# EAGLE board koznole - kopie (EAGLE 9.6.2)
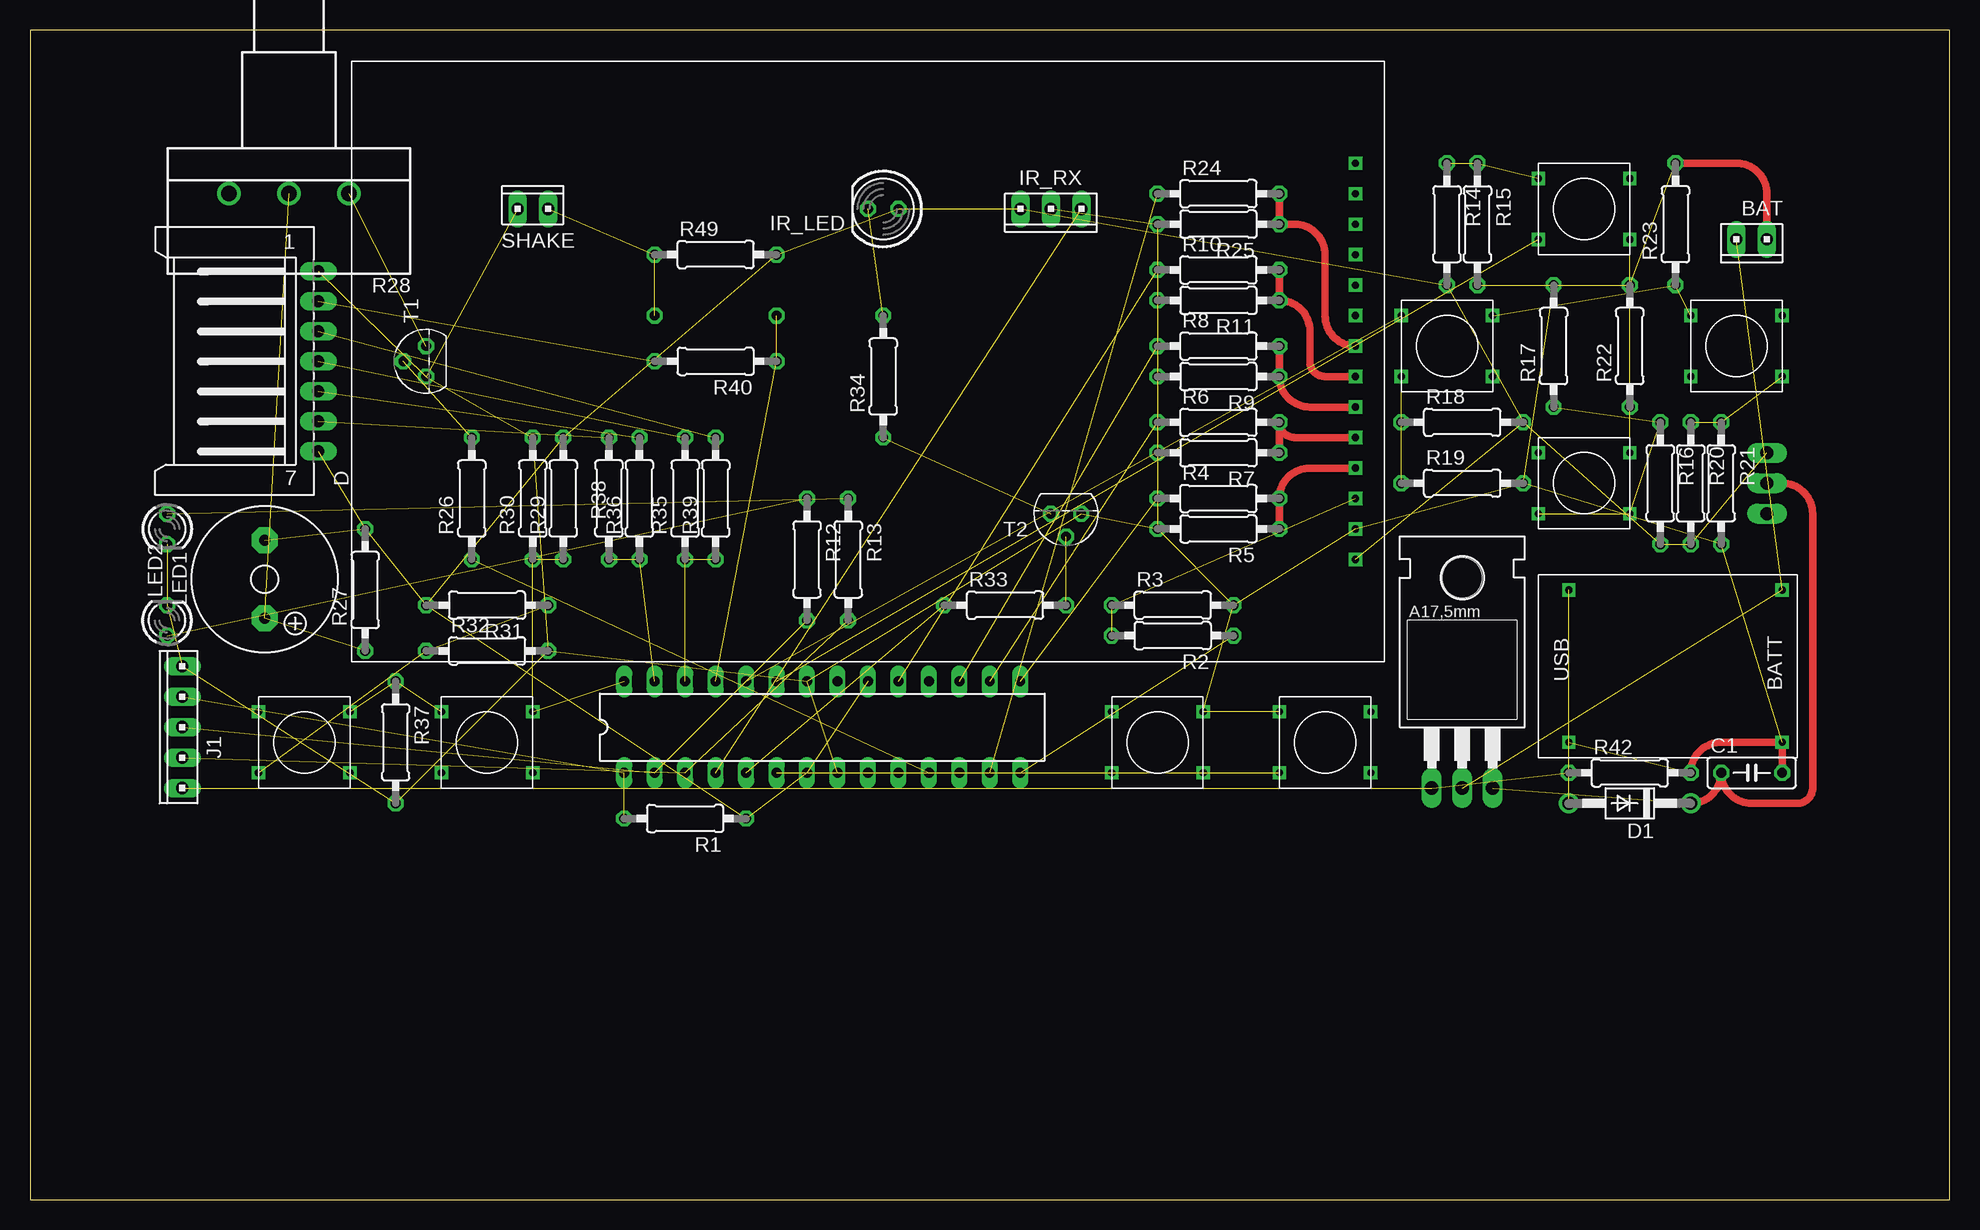
[diagram p0: board, top side]
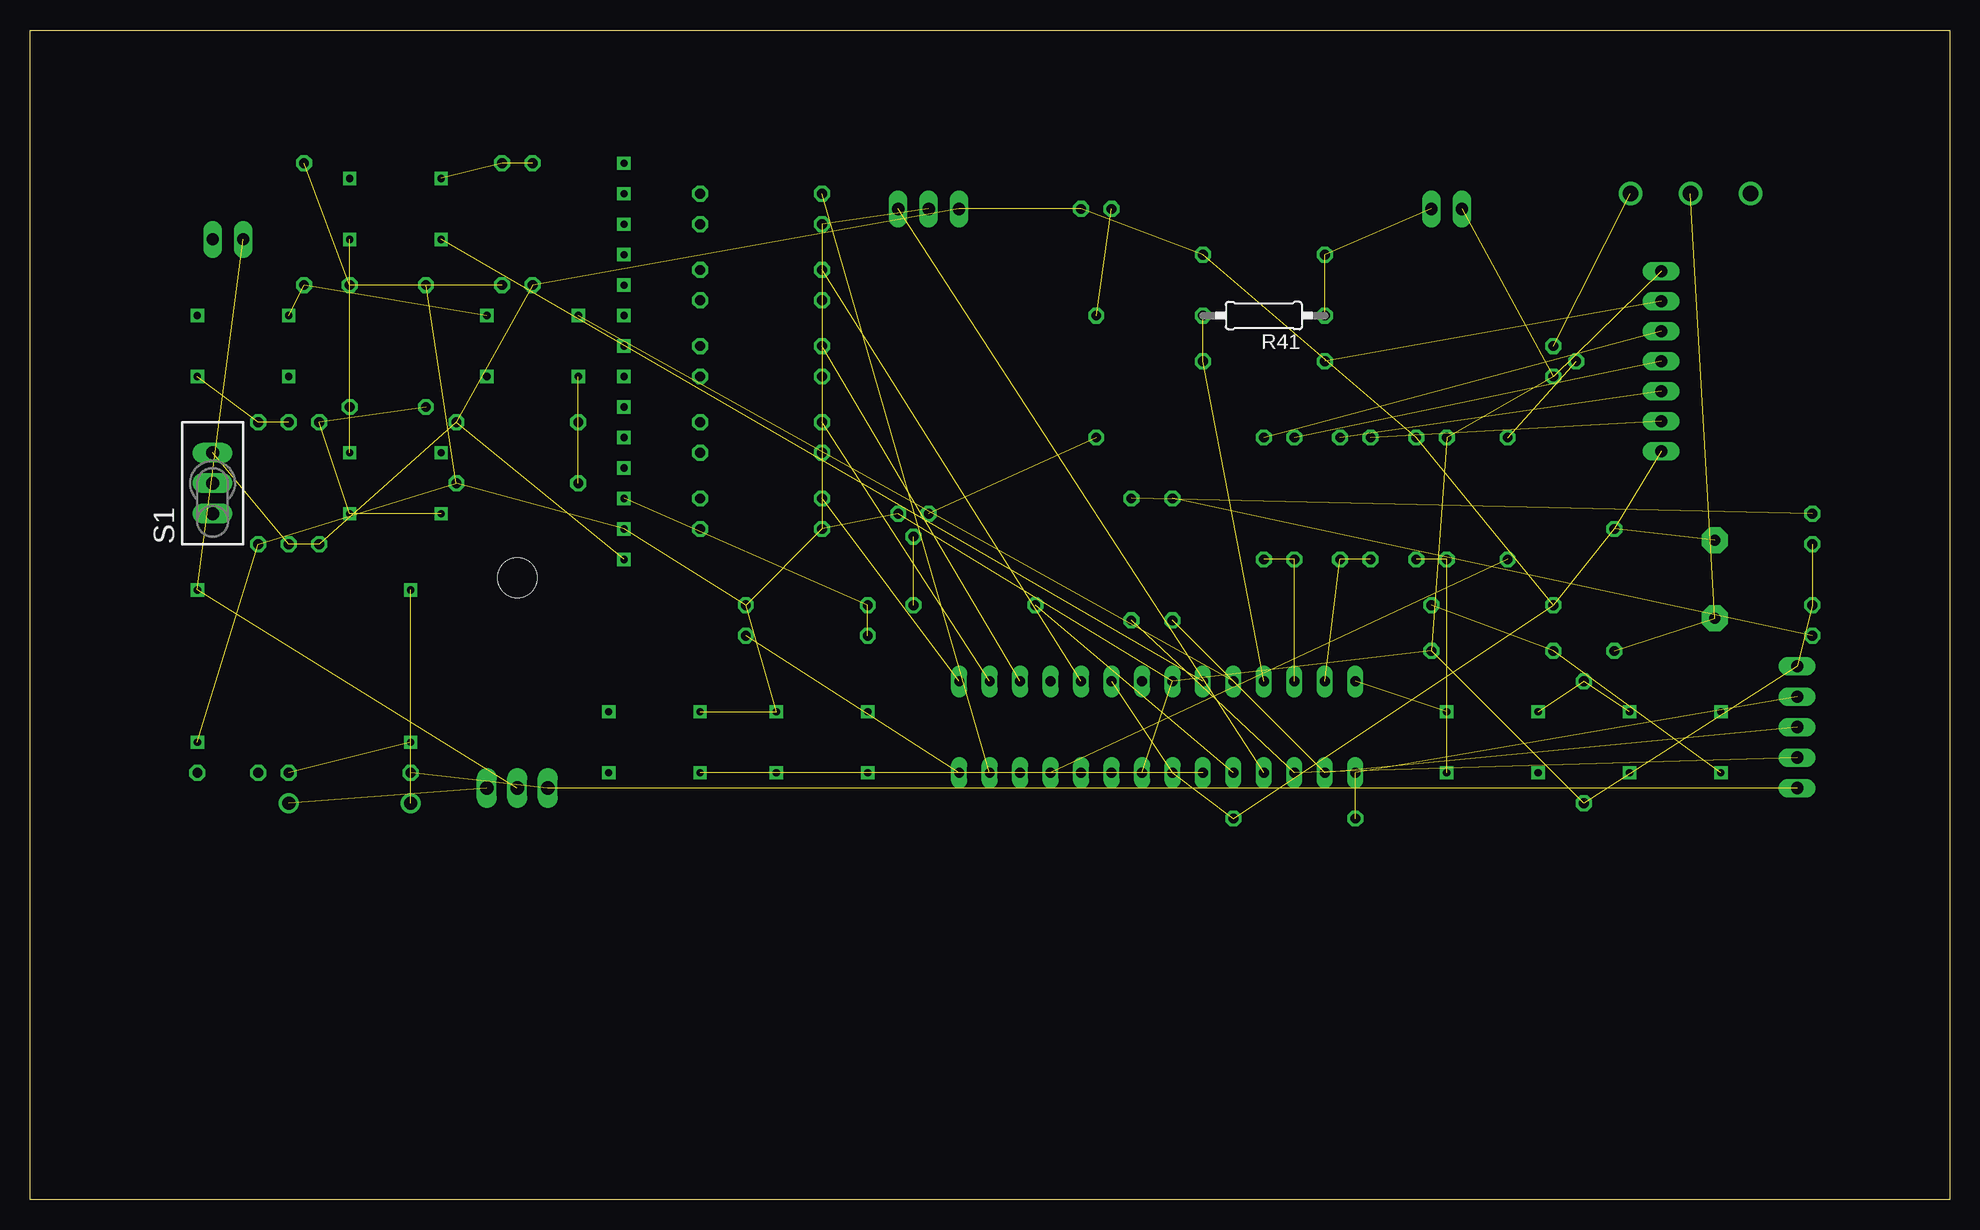
[diagram p1: board, bottom side, seen from below]

Size 160 x 97.46 mm. Coordinates in mm from the lower left corner, seen from the top.
Outline: 0,0 160,0 160,97.46 0,97.46 0,0
Copper layers (1*16): Top 0.035mm / dielectric 1.5mm / Bottom 0.035mm
Design rules "default *": minimum track width 24mil, minimum drill 0.6mm, track to track 24mil, track to pad 24mil, pad to pad 24mil, via to via 24mil, smd to smd 6mil, copper to edge 40mil, drill to drill 6mil, minimum pad ring 10mil, minimum via ring 8mil, stop-mask expansion 4mil, vias tented up to drill 0mil, thermal gap 10mil

## Footprints (pad centres in the part's own frame; a part is rotated, then mirrored left to right if it is on the bottom)
10X02MTA = drill 1.016 long: 1 1.27,0; 2 -1.27,0
C050-025X075 = drill 0.813 octagon: 1 -2.54,0; 2 2.54,0
L07P = drill 1.016 long: 1 7.5,-6.25; 2 5,-6.25; 3 2.5,-6.25; 4 0,-6.25; 5 -2.5,-6.25; 6 -5,-6.25; 7 -7.5,-6.25
DO41-10 = drill 1.118: A 5.08,0; C -5.08,0
DIL28-3 = drill 0.813 long: 1 -16.51,-3.81; 2 -13.97,-3.81; 3 -11.43,-3.81; 4 -8.89,-3.81; 5 -6.35,-3.81; 6 -3.81,-3.81; 7 -1.27,-3.81; 8 1.27,-3.81; 9 3.81,-3.81; 10 6.35,-3.81; 11 8.89,-3.81; 12 11.43,-3.81; 13 13.97,-3.81; 14 16.51,-3.81; 15 16.51,3.81; 16 13.97,3.81; 17 11.43,3.81; 18 8.89,3.81; 19 6.35,3.81; 20 3.81,3.81; 21 1.27,3.81; 22 -1.27,3.81; 23 -3.81,3.81; 24 -6.35,3.81; 25 -8.89,3.81; 26 -11.43,3.81; 27 -13.97,3.81; 28 -16.51,3.81
LED5MM = drill 0.813 octagon: A -1.27,0; K 1.27,0
10X03MTA = drill 1.016 long: 1 2.54,0; 2 0,0; 3 -2.54,0
10X05MTA = drill 1.016 long: 1 5.08,0; 2 2.54,0; 3 0,0; 4 -2.54,0; 5 -5.08,0
LED3MM = drill 0.813 octagon: A -1.27,0; K 1.27,0
TO220BH = drill 1.118 long: D 0,-6.35; G -2.54,-6.35; S 2.54,-6.35 | hole 3.302: 0,11.176
0207/10 = drill 0.813 octagon: 1 -5.08,0; 2 5.08,0
CIP20C-6MM = drill 1.3 pad 1.93: A -5,0; E 5,0; S 0,0
TL3XPO = drill 1.1 pad 1.422 long: 1 -2.54,0; 2 0,0; 3 2.54,0
F/QMX = drill 0.914 pad 2.159 octagon: + 3.251,0; - -3.251,0
TO92 = drill 0.813 octagon: 1 1.27,0; 2 0,1.905; 3 -1.27,0
TACT = drill 0.6 square: P$1 -3.81,2.54; P$2 -3.81,-2.54; P$3 3.81,-2.54; P$4 3.81,2.54
DISPLAY = drill 0.6 square: CS -40.64,11.43; D/C -40.64,6.35; GND -40.64,13.97; LED -40.64,-1.27; RESET -40.64,8.89; SCK -40.64,1.27; SDI -40.64,3.81; SDO -40.64,-3.81; T_CLK -40.64,-6.35; T_CS -40.64,-8.89; T_DIN -40.64,-11.43; T_IRQ -40.64,-16.51; T_OUT -40.64,-13.97; VCC -40.64,16.51
LI_ION_CHARGER = drill 0.6 square: BAT+ 8.89,6.35; BAT- 8.89,-6.35; GND -8.89,-6.35; VIN -8.89,6.35

## Placement (x,y rotation side)
BAT  [10X02MTA]  143.51,80.01 180 top
C1  1uF  [C050-025X075]  143.51,35.56 0 top
D  [L07P]  17.78,69.85 90 top
D1  1N4004  [DO41-10]  133.35,33.02 180 top
IC1  MEGA8-P  [DIL28-3]  66.04,39.37 0 top
IR_LED  [LED5MM]  71.12,82.55 180 top
IR_RX  [10X03MTA]  85.09,82.55 180 top
J1  [10X05MTA]  12.7,39.37 90 top
LED1  [LED3MM]  11.43,55.88 270 top
LED2  [LED3MM]  11.43,48.26 90 top
Q1  IRF4905  [TO220BH]  119.38,40.64 0 top
R1  10k  [0207/10]  54.61,31.75 180 top
R2  1k  [0207/10]  95.25,46.99 180 top
R3  2k  [0207/10]  95.25,49.53 0 top
R4  1k  [0207/10]  99.06,58.42 0 top
R5  2k  [0207/10]  99.06,55.88 180 top
R6  1k  [0207/10]  99.06,64.77 0 top
R7  2k  [0207/10]  99.06,62.23 180 top
R8  1k  [0207/10]  99.06,71.12 0 top
R9  2k  [0207/10]  99.06,68.58 180 top
R10  1k  [0207/10]  99.06,77.47 0 top
R11  2k  [0207/10]  99.06,74.93 180 top
R12  10k  [0207/10]  64.77,53.34 270 top
R13  10k  [0207/10]  68.2,53.34 270 top
R14  10k  [0207/10]  118.11,81.28 270 top
R15  1k  [0207/10]  120.65,81.28 270 top
R16  10k  [0207/10]  135.89,59.69 270 top
R17  3k  [0207/10]  127,71.12 90 top
R18  10k  [0207/10]  119.38,64.77 0 top
R19  1k  [0207/10]  119.38,59.69 0 top
R20  10k  [0207/10]  138.43,59.69 270 top
R21  3k  [0207/10]  140.97,59.69 270 top
R22  10k  [0207/10]  133.35,71.12 90 top
R23  10k  [0207/10]  137.16,81.28 90 top
R24  1k  [0207/10]  99.06,83.82 0 top
R25  2k  [0207/10]  99.06,81.28 180 top
R26  1k  [0207/10]  36.83,58.42 90 top
R27  1k  [0207/10]  27.94,50.8 90 top
R28  [CIP20C-6MM]  21.59,83.82 180 top
R29  10k  [0207/10]  44.45,58.42 90 top
R30  1k  [0207/10]  41.91,58.42 90 top
R31  10k  [0207/10]  38.1,49.53 180 top
R32  3k  [0207/10]  38.1,45.72 0 top
R33  1k  [0207/10]  81.28,49.53 0 top
R34  47Ohm  [0207/10]  71.12,68.58 90 top
R35  1k  [0207/10]  54.61,58.42 90 top
R36  2k  [0207/10]  50.8,58.42 90 top
R37  10k  [0207/10]  30.48,38.1 270 top
R38  1k  [0207/10]  48.26,58.42 90 top
R39  2k  [0207/10]  57.15,58.42 90 top
R40  1k  [0207/10]  57.15,69.85 180 top
R41  2k  [0207/10]  57.15,73.66 180 bottom
R42  100k  [0207/10]  133.35,35.56 0 top
R49  10k  [0207/10]  57.15,78.74 0 top
S1  TL36PO  [TL3XPO]  144.78,59.69 90 bottom
SG1  F/QMX  [F/QMX]  19.56,51.69 270 top
SHAKE  [10X02MTA]  41.91,82.55 0 top
T1  2N3904  [TO92]  33.02,69.85 90 top
T2  2N3904  [TO92]  86.36,57.15 180 top
U$1  TACT  [TACT]  129.54,82.55 0 top
U$2  DISPLAY  [DISPLAY]  69.85,69.85 180 top
U$3  TACT  [TACT]  118.11,71.12 0 top
U$4  TACT  [TACT]  142.24,71.12 0 top
U$5  TACT  [TACT]  129.54,59.69 180 top
U$6  TACT  [TACT]  93.98,38.1 0 top
U$7  TACT  [TACT]  107.95,38.1 0 top
U$8  TACT  [TACT]  38.1,38.1 180 top
U$9  TACT  [TACT]  22.86,38.1 180 top
U$10  LI_ION_CHARGER  [LI_ION_CHARGER]  137.16,44.45 0 top

## Library data of the parts
BAT IR_RX J1 SHAKE = con-amp
C1 = rcl; SPICEPREFIX: C
D = con-amp-mt; OC_FARNELL: unknown; OC_NEWARK: unknown
D1 = diode
IC1 = atmel; OC_FARNELL: unknown; OC_NEWARK: unknown
IR_LED LED1 LED2 = led
Q1 = transistor-power
R1-R27 R29-R42 R49 = rcl; SPICEPREFIX: R
R28 = pot
S1 = switch
SG1 = buzzer; OC_FARNELL: unknown; OC_NEWARK: unknown
T1 T2 = transistor
U$1-U$10 = PSicho

## Nets
+5V: D.7 IC1.7 IC1.20 IR_LED.A IR_RX.1 R1.1 R14.2 R16.2 R18.2 R20.2 R27.2 R29.2 R31.2 R49.2 S1.3 SG1.- U$2.VCC
GND: BAT.2 C1.2 D.1 IC1.8 IC1.22 IR_RX.2 J1.1 LED1.K LED2.K R3.2 R5.2 R7.2 R9.2 R11.2 R15.2 R17.2 R19.2 R21.2 R22.2 R23.2 R25.2 R30.2 R32.2 R37.2 R42.2 SHAKE.2 T1.3 T2.3 U$2.GND U$6.P$4 U$7.P$1 U$10.BAT- U$10.GND
N$1: IC1.1 J1.2 R1.2
N$2: R2.2 R3.1 U$2.CS
N$3: R4.2 R5.1 U$2.RESET
N$4: R6.2 R7.1 U$2.D/C
N$5: R8.2 R9.1 U$2.SDI
N$6: R10.2 R11.1 U$2.SCK
N$7: IC1.17 R8.1
N$8: IC1.13 R24.1
N$9: IC1.16 R6.1
N$10: IC1.15 R4.1
N$11: R14.1 R15.1 U$1.P$1
N$12: R27.1 R28.S SG1.+
N$13: IC1.19 R10.1
N$14: R16.1 R17.1 U$5.P$1 U$5.P$4
N$15: R18.1 R19.1 U$3.P$2
N$16: R20.1 R21.1 U$4.P$3
N$17: LED1.A R13.1
N$18: LED2.A R12.1
N$19: IC1.2 J1.3 R12.2
N$20: IC1.3 J1.4 R13.2
N$21: R23.1 U$3.P$4 U$4.P$1
N$22: R22.1 U$1.P$3 U$5.P$2
N$23: IC1.23 U$1.P$2
N$24: R24.2 R25.1 U$2.LED
N$25: IC1.24 U$3.P$1
N$26: R26.2 T1.2
N$27: IC1.11 R26.1
N$28: R28.A T1.1
N$29: R29.1 R30.1 U$8.P$1
N$30: IC1.14 R2.1
N$31: R31.1 R32.1 U$9.P$4
N$32: IC1.12 U$7.P$2
N$33: IC1.28 U$8.P$2
N$34: IC1.6 U$6.P$3
N$35: R37.1 U$8.P$3 U$9.P$2
N$36: IC1.4 IR_RX.3
N$37: R33.2 T2.2
N$38: R34.1 T2.1
N$39: IR_LED.K R34.2
N$40: IC1.5 R33.1
N$41: D.6 R38.2
N$42: D.5 R36.2
N$43: D.4 R35.2
N$44: BAT.1 Q1.D U$10.BAT+
N$45: D.3 R39.2
N$46: D.2 R40.2
N$48: IC1.26 R35.1 R39.1
N$49: R41.1 R49.1 SHAKE.1
N$50: D1.A J1.5 Q1.G R42.1 U$10.VIN
N$51: C1.1 D1.C Q1.S S1.2
N$52: IC1.25 R40.1 R41.2
N$54: IC1.27 R36.1 R38.1

## Tracks (layer width: path | path; a pad name or v marks a point on that pad's centre or on a via)
+5V  (16 unrouted)
GND  (29 unrouted)
  Top 0.61: C1.2 U$10.BAT- 140.97,38.1 arc90 R42.2 | R23.2 142.24,86.36 arc-90 144.78,83.82 BAT.2
N$1  (2 unrouted)
N$2  (2 unrouted)
N$3
  Top 0.61: R5.1 R4.2 arc-90 106.68,60.96 U$2.RESET
N$4
  Top 0.61: R7.1 R6.2 arc90 105.41,63.5 U$2.D/C
N$5
  Top 0.61: R8.2 R9.1 arc90 106.68,66.04 U$2.SDI
N$6
  Top 0.61: U$2.SCK 107.95,68.58 arc-90 106.68,69.85 106.68,72.39 arc90 R11.1 R10.2
N$7  (1 unrouted)
N$8  (1 unrouted)
N$9  (1 unrouted)
N$10  (1 unrouted)
N$11  (2 unrouted)
N$12  (2 unrouted)
N$13  (1 unrouted)
N$14  (3 unrouted)
N$15  (2 unrouted)
N$16  (2 unrouted)
N$17  (1 unrouted)
N$18  (1 unrouted)
N$19  (2 unrouted)
N$20  (2 unrouted)
N$21  (2 unrouted)
N$22  (2 unrouted)
N$23  (1 unrouted)
N$24
  Top 0.61: U$2.LED arc-90 107.95,73.66 107.95,78.74 arc90 105.41,81.28 R25.1 R24.2
N$25  (1 unrouted)
N$26  (1 unrouted)
N$27  (1 unrouted)
N$28  (1 unrouted)
N$29  (2 unrouted)
N$30  (1 unrouted)
N$31  (2 unrouted)
N$32  (1 unrouted)
N$33  (1 unrouted)
N$34  (1 unrouted)
N$35  (2 unrouted)
N$36  (1 unrouted)
N$37  (1 unrouted)
N$38  (1 unrouted)
N$39  (1 unrouted)
N$40  (1 unrouted)
N$41  (1 unrouted)
N$42  (1 unrouted)
N$43  (1 unrouted)
N$44  (2 unrouted)
N$45  (1 unrouted)
N$46  (1 unrouted)
N$48  (2 unrouted)
N$49  (2 unrouted)
N$50  (4 unrouted)
N$51  (1 unrouted)
  Top 0.61: D1.C arc90 C1.1 arc90 143.51,33.02 147.32,33.02 arc90 148.59,34.29 148.59,57.15 arc90 146.05,59.69 S1.2
N$52  (2 unrouted)
N$54  (2 unrouted)